# EAGLE board 4xSplitter (EAGLE 8.7.1)
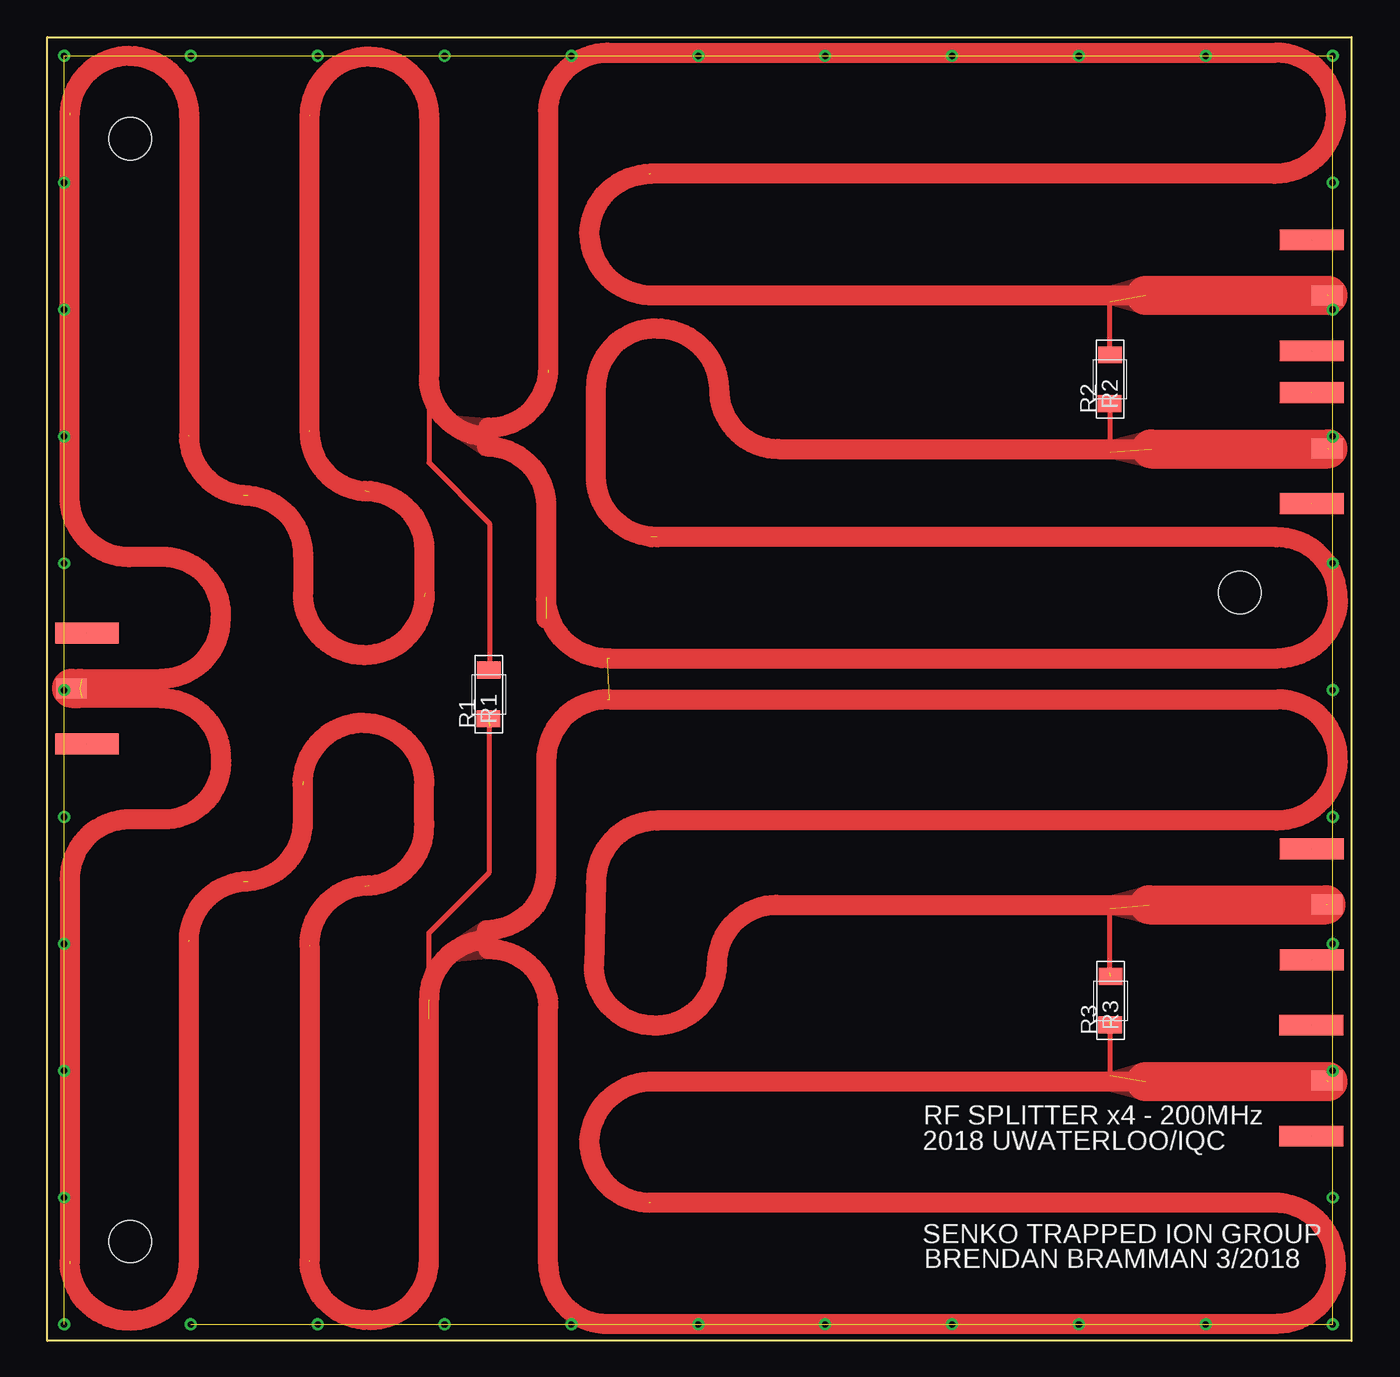
[diagram p0: board, top side]
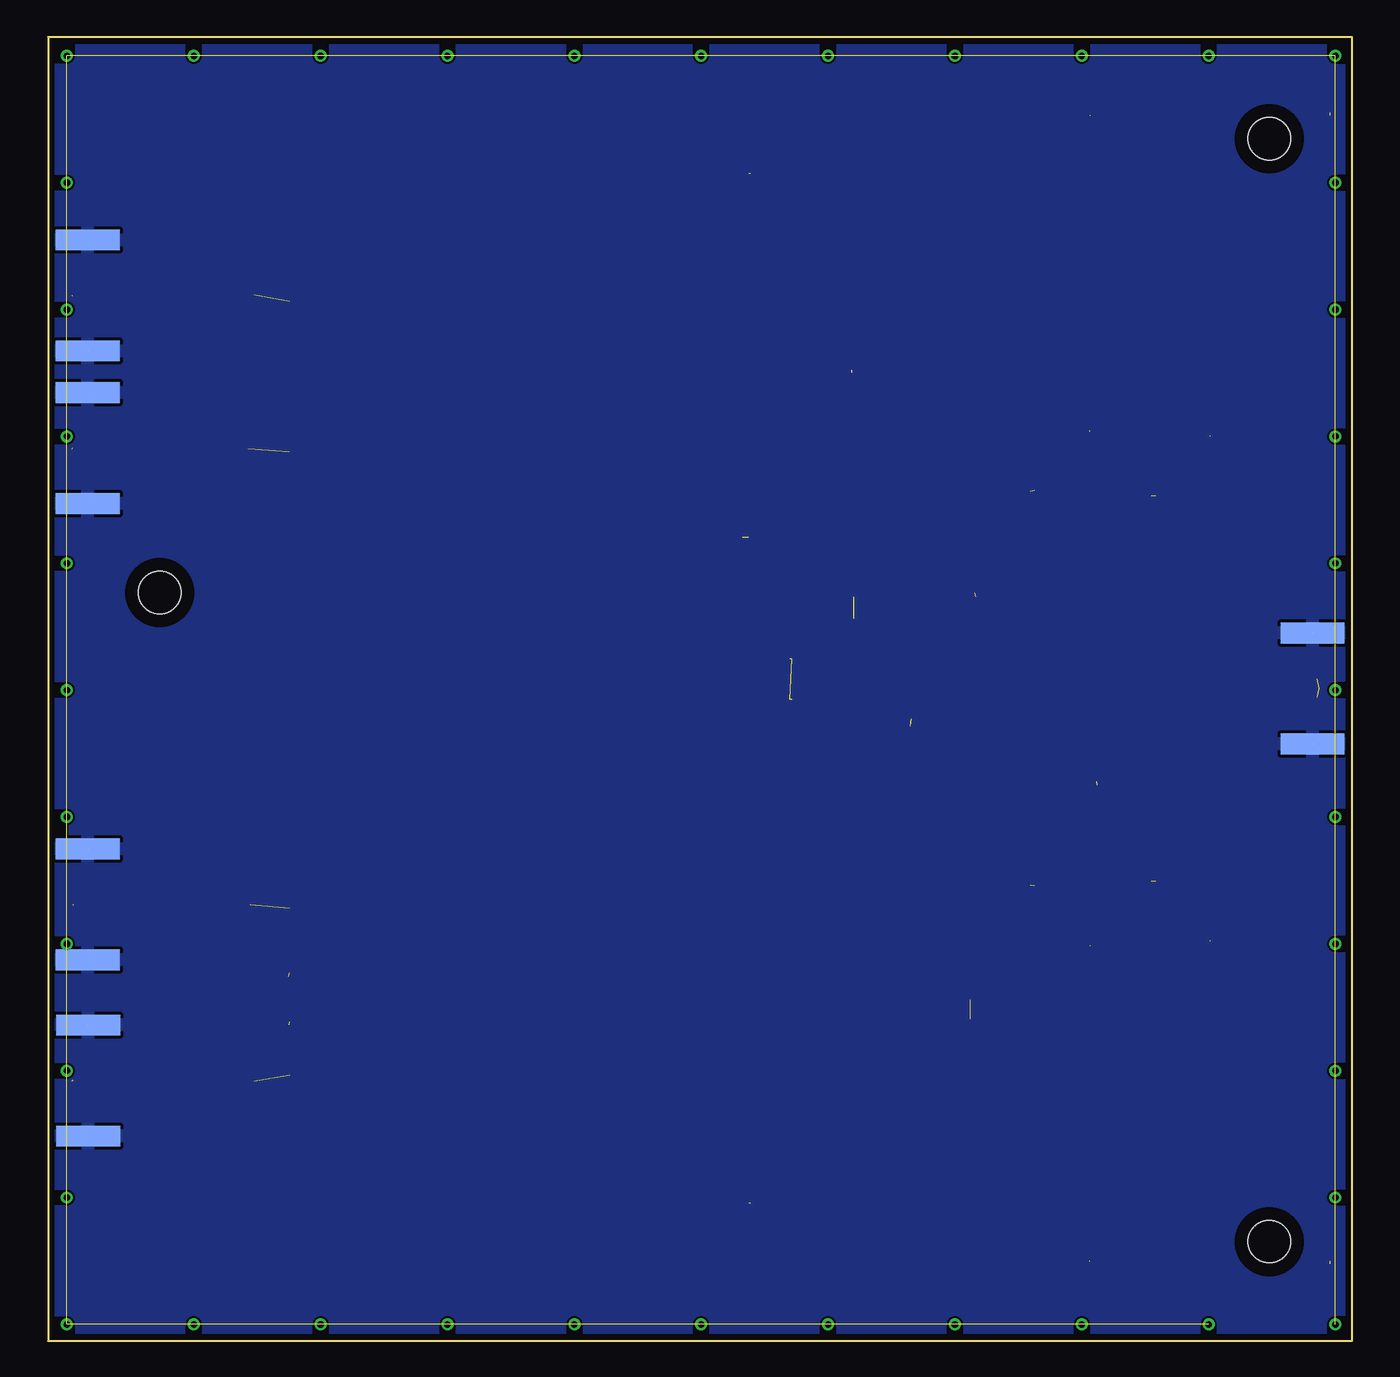
[diagram p1: board, bottom side, seen from below]

No outline drawn. Coordinates in mm, seen from the top.
Copper layers (1*16): Top 0.035mm / dielectric 1.5mm / Bottom 0.035mm
Design rules "default": minimum track width 6mil, minimum drill 0.35mm, track to track 6mil, track to pad 6mil, pad to pad 6mil, via to via 6mil, smd to smd 6mil, copper to edge 40mil, drill to drill 6mil, minimum pad ring 10mil, minimum via ring 8mil, stop-mask expansion 4mil, vias tented up to drill 0mil, thermal gap 10mil
Holes 3.26 mm at 6.35,7.62 91.44,57.4 6.35,92.2
Milling: 4 lines

## Footprints (pad centres in the part's own frame; a part is rotated, then mirrored left to right if it is on the bottom)
SMA-END = smd 1.6 x 4.902 bottom: P$2 -4.255,3.039; P$3 4.255,3.039 | smd 1.6 x 4.902: P$4 4.255,3.039; P$5 -4.255,3.039 | smd 1.499 x 2.362: SIGNAL 0,1.854
R1206 = smd 1.295 x 1.803: P$1 -1.854,0.025; P$2 1.88,0

## Placement (x,y rotation side)
J1  SMA-END  [SMA-END]  -0.01,50.05 270 top
J2  SMA-END  [SMA-END]  100,80.18 90 top
J3  SMA-END  [SMA-END]  99.99,68.46 90 top
J4  SMA-END  [SMA-END]  99.97,19.97 90 top
J5  SMA-END  [SMA-END]  99.98,33.49 90 top
R1  100 - Ohm  [R1206]  33.85,49.57 90 top
R2  100 - Ohm  [R1206]  81.48,73.74 90 top
R3  100 - Ohm  [R1206]  81.53,26.09 90 top

## Library data of the parts
J1-J5 = lib; PARTNUM: ACX1911-ND
R1-R3 = lib; POWER: 1W; SIZE: 1206; TOLERANCE: 1%

## Nets
GROUND: J1.P$2 J1.P$3 J1.P$4 J1.P$5 J2.P$2 J2.P$3 J2.P$4 J2.P$5 J3.P$2 J3.P$3 J3.P$4 J3.P$5 J4.P$2 J4.P$3 J4.P$4 J4.P$5 J5.P$2 J5.P$3 J5.P$4 J5.P$5
N$1: J1.SIGNAL J2.SIGNAL J3.SIGNAL J4.SIGNAL J5.SIGNAL R1.P$1 R1.P$2 R2.P$1 R2.P$2 R3.P$1 R3.P$2

## Tracks (layer width: path | path; a pad name or v marks a point on that pad's centre or on a via)
GROUND  (10 unrouted)
  pour Bottom: 1,1 99,1 99,99 1,99
GROUND1  (via drill 0.51)  (39 unrouted)
  other vias: 1.27,98.55 1.27,88.82 98.55,49.91 1.27,79.1 1.27,69.37 1.27,59.64 1.27,49.91 1.27,40.18 1.27,30.45 1.27,20.73 1.27,11 1.27,1.27 11,1.27 20.73,1.27 30.45,1.27 40.18,1.27 49.91,1.27 59.64,1.27 69.37,1.27 79.1,1.27 88.82,1.27 98.55,1.27 98.55,11 98.55,20.73 98.55,30.45 98.55,40.18 98.55,59.64 98.55,69.37 98.55,79.1 98.55,88.82 98.55,98.55 88.82,98.55 79.1,98.55 69.37,98.55 59.64,98.55 49.91,98.55 40.18,98.55 30.45,98.55 20.73,98.55 11,98.55
N$1  (35 unrouted)
  Top 0.381: R2.P$2 81.48,79.72 | R2.P$1 81.48,68.17 arc90 81.5,68.15 | 81.48,24.48 81.48,20.38 | 81.48,28.21 81.48,33.18 | 29.25,73.95 29.25,67.35 33.9,62.7 33.9,51.5 R1.P$2 | 29.25,24.7 29.25,31.3 33.9,35.95 33.9,47.15
  Top 1.537: 2.65,50.76 8.7,50.8 arc90 13.3,55.35 arc90 9.25,60.1 6.25,60.1 arc-90 1.7,64.7 1.7,94.2 | 20.1,69.8 20.1,94 | 10.85,69.4 10.85,93.95 arc90 6.3,98.55 arc90 1.7,94 | 15.05,64.85 arc-90 19.6,60.25 19.6,57.3 arc90 24.3,52.6 arc90 28.95,57.35 | 24.35,65.2 arc-90 28.9,60.6 28.9,57.1 | 20.1,69.75 arc90 24.65,65.15 | 20.1,93.95 arc-90 24.7,98.5 arc-90 29.25,93.9 29.25,73.95 arc90 33.8,69.35 | 33.8,70.05 arc90 38.4,74.45 | 33.7,68.6 arc-90 38.25,64 38.25,55.4 | 38.4,74.25 38.4,94.2 arc-90 42.95,98.8 94.25,98.8 arc-90 98.8,94.2 arc-90 94.1,89.5 46.15,89.5 | 46.25,89.5 arc90 41.55,84.8 arc90 46.6,80.2 84.2,80.2 | 42.95,52.35 arc-90 38.25,57.05 | 43.1,52.35 94.4,52.35 arc90 98.95,56.95 arc90 94.25,61.65 46.3,61.65 | 46.75,61.65 arc-90 42.05,66.35 42.05,73.1 arc-90 46.65,77.65 arc-90 51.5,73 arc90 56.05,68.4 84.65,68.4 | 10.85,69.45 arc90 15.4,64.85 | 2.65,49.34 8.7,49.3 arc-90 13.3,44.75 arc-90 9.25,40 6.25,40 arc90 1.7,35.4 1.7,5.9 | 20.1,30.3 20.1,6.1 | 10.85,30.7 10.85,6.15 arc-90 6.3,1.55 arc-90 1.7,6.1 | 15.05,35.25 arc90 19.6,39.85 | 24.35,34.9 arc90 28.9,39.5 | 20.1,30.35 arc-90 24.65,34.95 | 20.1,6.15 arc90 24.7,1.6 arc90 29.25,6.2 29.25,26.15 arc-90 33.8,30.75 | 33.8,30.05 arc-90 38.4,25.65 38.4,5.9 arc90 42.95,1.3 94.25,1.3 arc90 98.8,5.9 arc90 94.1,10.6 46.15,10.6 | 33.7,31.5 arc90 38.25,36.1 38.25,44.5 arc-90 42.95,49.2 | 46.25,10.6 arc-90 41.55,15.3 arc-90 46.6,19.9 84.2,19.9 | 43.1,49.2 94.4,49.2 arc-90 98.95,44.6 arc-90 94.25,39.9 46.75,39.9 arc90 42.05,35.2 41.9,28.75 arc90 46.5,24.2 arc90 51.35,28.85 arc-90 55.9,33.45 84.5,33.45 | 10.85,30.65 arc-90 15.4,35.25
  Top 2.985: 84.65,68.4 98.2,68.4 | J1.SIGNAL 2.5,50.05 | 84.2,80.2 98.2,80.2 | 84.5,33.45 98.05,33.45 | 84.2,19.9 98.2,19.9
  pour Top: 30.45,70.9 34.55,70.55 34.25,69.3 34.4,67.95 33.4,68.05 30.75,69.8
  pour Top: 30.45,29.2 34.55,29.55 34.25,30.8 34.4,32.15 33.4,32.05 30.75,30.3
  pour Top: 81.4,80.85 83.75,81.55 83.75,78.85 81.4,79.5
  pour Top: 81.5,69.05 84.2,69.75 84.2,67.05 81.5,67.7
  pour Top: 81.4,34.1 84.05,34.8 84.05,32.1 81.4,32.75
  pour Top: 81.4,20.55 83.75,21.25 83.75,18.55 81.4,19.2
N$4  (1 unrouted)
  Top 1.537: 19.55,42.65 arc-90 24.2,47.4 arc-90 28.9,42.7 28.9,39.75 | 19.6,39.4 19.6,42.9

## Text on the board
tPlace: RF SPLITTER x4 - 200MHz | 2018 UWATERLOO/IQC | SENKO TRAPPED ION GROUP | BRENDAN BRAMMAN 3/2018